# Altium PCB main.PcbDoc
Units mil, origin at the board's own origin, x right, y up, seen from the top; angles counter-clockwise.
Board outline 3937.01 x 1968.5 mil, 2 copper layers (Top Layer, Bottom Layer); 69 components, 62 nets, 286 pads, 89 vias.
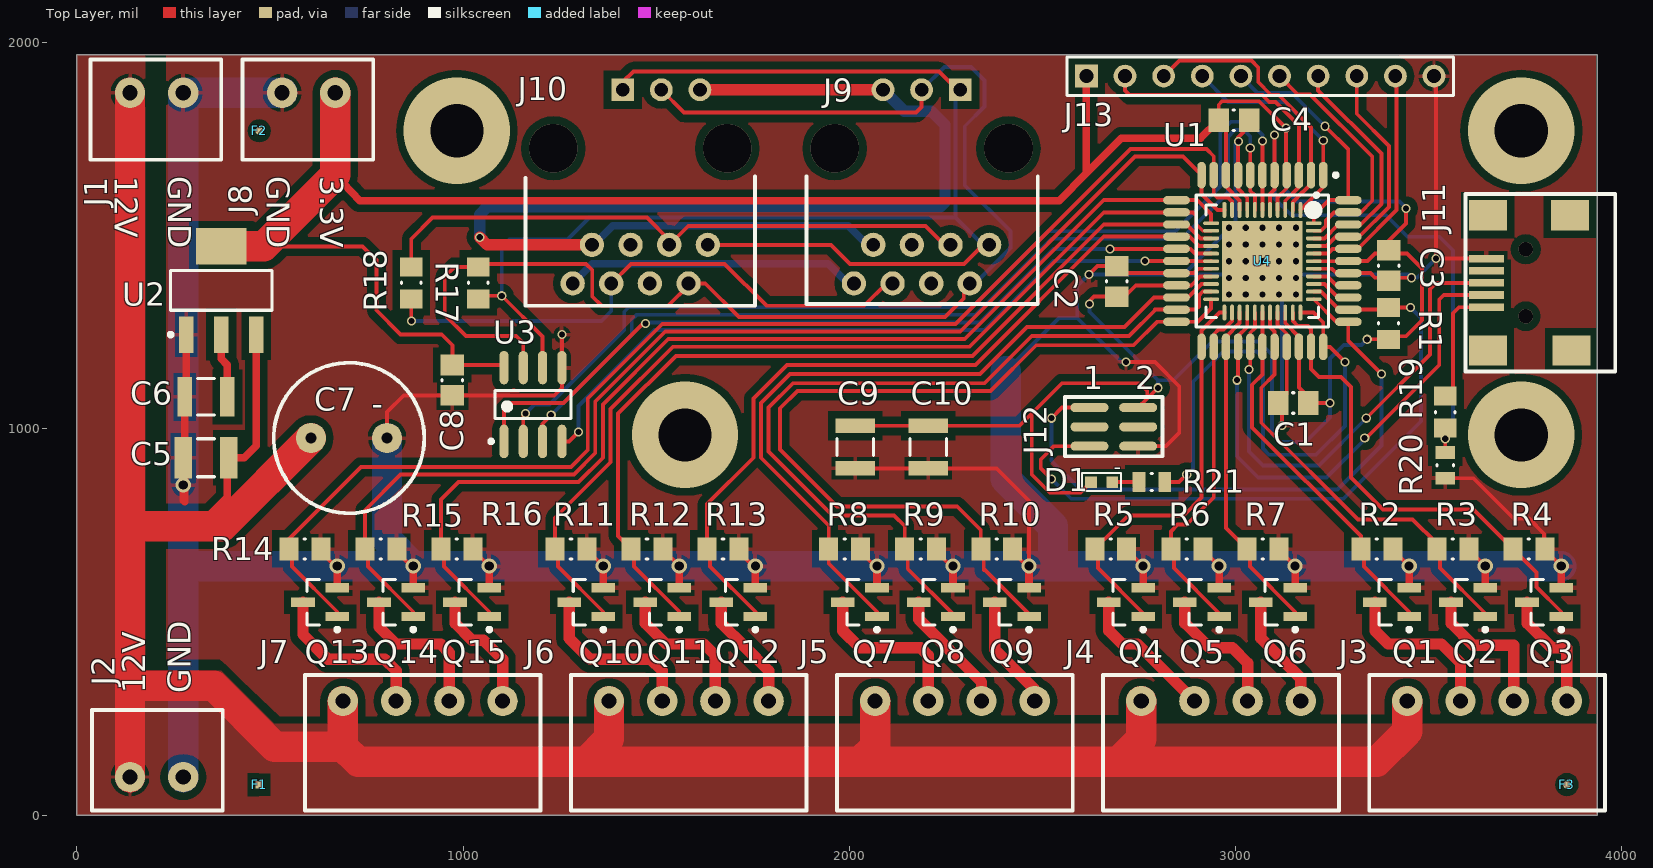
[diagram p0: Top Layer view]
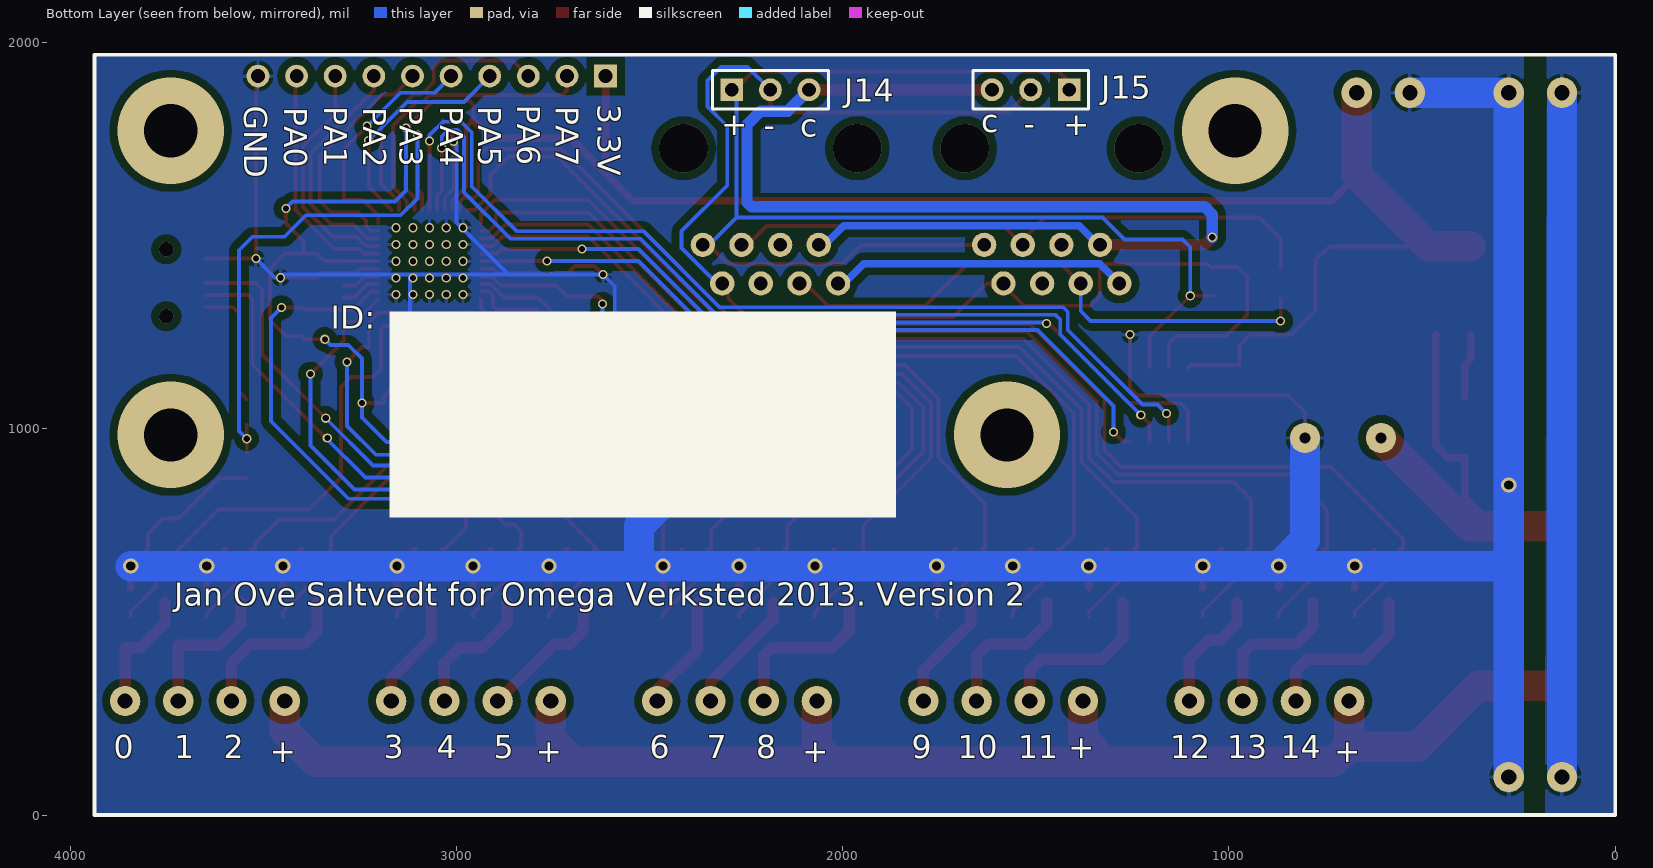
[diagram p1: Bottom Layer view, seen from below]
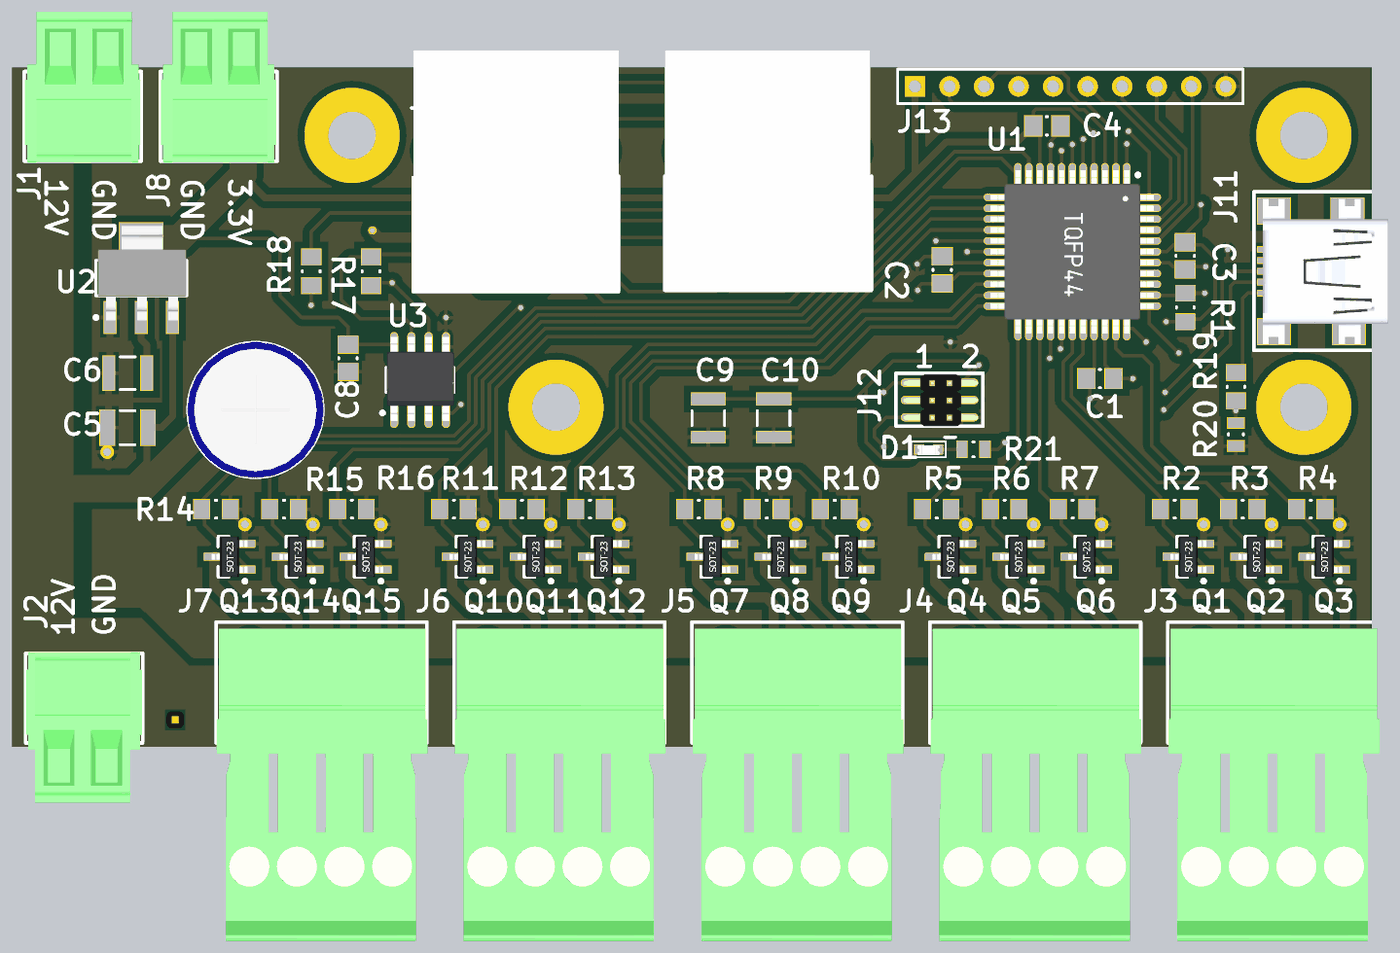
[diagram p2: 3D render of the assembled board from above, using the file's embedded part models]

## Layer stack, top to bottom
Top Layer: signal copper 1.4
Dielectric: dielectric 12.6, FR-4, Dk 4.8
Bottom Layer: signal copper 1.4

## Board outline
0,0 0,1968.5 3937.01,1968.5 3937.01,0

## Design rules (kind name [scope] priority, off if disabled: settings)
Clearance Clearance_1 [InPolygon] p1: gap=19.68
Clearance [All] p2: gap=6
ComponentClearance NO_MCU_CHECK [InComponent('U1') vs InComponent('U4')] p1: gap=-2362.2 collisioncheckmode=3 verticalgap=-2362.2 showdistances=TRUE
ComponentClearance [All] p2: gap=10 collisioncheckmode=3 verticalgap=0 showdistances=FALSE
HoleSize [All] p1: absolutevalues=TRUE maxlimit=196.85 minlimit=1.18 maxpercent=80.000 minpercent=20.000
MinimumSolderMaskSliver [All] p1: minsoldermaskwidth=3.94
PasteMaskExpansion [All] p1: expansion=-1.97
PolygonConnect [All] p1: connectstyle=Relief reliefconductorwidth=10 reliefentries=4 polygonreliefangle="90 Angle" airgapwidth=10
RoutingVias [All] p1: holewidth=15.75 width=23.62 viastyle="Through Hole" minholewidth=11.81 minwidth=19.68 maxholewidth=157.48 maxwidth=354.33
SilkToSilkClearance [All] p1: silktosilkclearance=3.94
SilkToSolderMaskClearance [IsPad] p1: minsilkscreentomaskgap=3.94 clearancetoexposedcopper=TRUE
SolderMaskExpansion [All] p1: expansion=0
Width [All] p1: maxlimit=157.48 minlimit=6 preferedwidth=10
22 further rules are at their usual default settings.

## Components (designator, comment, footprint, x,y, rotation, side; value= is the part's Value field where it differs from the comment)
C1 "CAP 3.3nF 10V 0805(2012)" CAPC0805(2012)145_M 3149.61,1066.93 r0 top
C2 "CAP 3.3nF 10V 0805(2012)" CAPC0805(2012)145_M 2692.91,1381.89 r270 top
C3 "CAP 3.3nF 10V 0805(2012)" CAPC0805(2012)145_M 3396.57,1422.82 r90 top
C4 "CAP 3.3nF 10V 0805(2012)" CAPC0805(2012)145_M 2996.06,1799.21 r180 top
C5 "CAP 1uF 16V 1210(3225)" CAPC1210(3225)155_N 334.65,925.2 r0 top
C6 "CAP 10uF 6.3V 1210(3225)" CAPC1210(3225)170_L 334.65,1082.68 r0 top
C7 "ELECTROLYTIC-CAP-220uF" ELECTROLYTIC-220UF 606.3,976.38 r0 top
C8 "CAP 3.3nF 10V 0805(2012)" CAPC0805(2012)145_M 972.44,1125.98 r90 top
C9 "CAP 10uF 6.3V 1210(3225)" CAPC1210(3225)170_L 2015.75,952.76 r90 top
C10 "CAP 10uF 6.3V 1210(3225)" CAPC1210(3225)170_L 2204.72,952.76 r90 top
D1 "LED-SMD-0603" LED-0603 2625.98,862.2 r0 top
F1 "Fiducial square" FIDU-SQUARE 460.63,66.93 r0 top
F2 "Fiducial round" FIDU-ROUND#1 472.44,1771.65 r0 top
F3 "Fiducial round" FIDU-ROUND#2 4334.63,90.55 r0 top
J1 "PLUGGABLE-TERMINAL-2" PLUG_TERMINAL_2 275.59,1870.08 r180 top
J2 "PLUGGABLE-TERMINAL-2" PLUG_TERMINAL_2 137.8,98.43 r0 top
J3 "PLUGGABLE-TERMINAL-4" PLUG_TERMINAL_4 3444.88,295.28 r0 top
J4 "PLUGGABLE-TERMINAL-4" PLUG_TERMINAL_4 2755.91,295.28 r0 top
J5 "PLUGGABLE-TERMINAL-4" PLUG_TERMINAL_4 2066.93,295.28 r0 top
J6 "PLUGGABLE-TERMINAL-4" PLUG_TERMINAL_4 1377.95,295.28 r0 top
J7 "PLUGGABLE-TERMINAL-4" PLUG_TERMINAL_4 688.98,295.28 r0 top
J8 "PLUGGABLE-TERMINAL-2" PLUG_TERMINAL_2 669.29,1870.08 r180 top
J9 "RJ-45 Connector" RJ-45 2362.2,1476.38 r180 top
J10 "RJ-45 Connector" RJ-45 1633.86,1476.38 r180 top
J11 "USB-MINI" USB-mini 3649.61,1314.96 r90 top
J12 "PDI" HEADER_SMD_3X2_50MIL 2622.05,1055.12 r270 top
J13 "Header 10" HDR1X10 2614.17,1913.39 r0 top
J14 "Header 3" HDR1X3 2287.4,1877.95 r180 bottom
J15 "Header 3" HDR1X3 1413.39,1877.95 r0 bottom
Q1 "TSM2314CX" SOT95P280X130-3N 3405.51,551.18 r180 top
Q2 "TSM2314CX" SOT95P280X130-3N 3602.36,551.18 r180 top
Q3 "TSM2314CX" SOT95P280X130-3N 3799.21,551.18 r180 top
Q4 "TSM2314CX" SOT95P280X130-3N 2716.54,551.18 r180 top
Q5 "TSM2314CX" SOT95P280X130-3N 2913.39,551.18 r180 top
Q6 "TSM2314CX" SOT95P280X130-3N 3110.24,551.18 r180 top
Q7 "TSM2314CX" SOT95P280X130-3N 2027.56,551.18 r180 top
Q8 "TSM2314CX" SOT95P280X130-3N 2224.41,551.18 r180 top
Q9 "TSM2314CX" SOT95P280X130-3N 2421.26,551.18 r180 top
Q10 "TSM2314CX" SOT95P280X130-3N 1318.9,551.18 r180 top
Q11 "TSM2314CX" SOT95P280X130-3N 1515.75,551.18 r180 top
Q12 "TSM2314CX" SOT95P280X130-3N 1712.6,551.18 r180 top
Q13 "TSM2314CX" SOT95P280X130-3N 629.92,551.18 r180 top
Q14 "TSM2314CX" SOT95P280X130-3N 826.77,551.18 r180 top
Q15 "TSM2314CX" SOT95P280X130-3N 1023.62,551.18 r180 top
R1 "10K 1% 0805(2012)" RESC0805(2012)_M 3396.57,1273.21 r270 top
R2 "10K 1% 0805(2012)" RESC0805(2012)_M 3366.14,688.98 r0 top
R3 "10K 1% 0805(2012)" RESC0805(2012)_M 3562.99,688.98 r0 top
R4 "10K 1% 0805(2012)" RESC0805(2012)_M 3759.84,688.98 r0 top
R5 "10K 1% 0805(2012)" RESC0805(2012)_M 2677.17,688.98 r0 top
R6 "10K 1% 0805(2012)" RESC0805(2012)_M 2874.02,688.98 r0 top
R7 "10K 1% 0805(2012)" RESC0805(2012)_M 3070.87,688.98 r0 top
R8 "10K 1% 0805(2012)" RESC0805(2012)_M 1988.19,688.98 r0 top
R9 "10K 1% 0805(2012)" RESC0805(2012)_M 2185.04,688.98 r0 top
R10 "10K 1% 0805(2012)" RESC0805(2012)_M 2381.89,688.98 r0 top
R11 "10K 1% 0805(2012)" RESC0805(2012)_M 1279.53,688.98 r0 top
R12 "10K 1% 0805(2012)" RESC0805(2012)_M 1476.38,688.98 r0 top
R13 "10K 1% 0805(2012)" RESC0805(2012)_M 1673.23,688.98 r0 top
R14 "10K 1% 0805(2012)" RESC0805(2012)_M 590.55,688.98 r0 top
R15 "10K 1% 0805(2012)" RESC0805(2012)_M 787.4,688.98 r0 top
R16 "10K 1% 0805(2012)" RESC0805(2012)_M 984.25,688.98 r0 top
R17 "120R 1% 0805(2012)" RESC0805(2012)_M 1039.37,1377.95 r90 top
R18 "120R 1% 0805(2012)" RESC0805(2012)_M 866.14,1377.95 r270 top
R19 "10K 1% 0805(2012)" RESC0805(2012)_M 3543.31,1043.31 r90 top
R20 "15K 1% 0805(2012)" RESC0805(2012)_L 3543.31,905.51 r90 top
R21 "200R 1% 0805(2012)" RESC0805(2012)_L 2783.46,862.2 r180 top
U1 "ATxmega64A4U-AU" 44A_N 3069.8,1434.63 r270 top
U2 "TLV1117" SOT230P700X180-4N 374.02,1358.27 r90 top
U3 "MAX3485" SOP127P600X175-8N 1181.1,1062.99 r90 top
U4 "ATxmega64A4U-MH" 44M1_N 3069.88,1434.06 r270 top

## Footprints (in the part's own frame and the unit in brackets; to place one, negate y for a bottom-side part, rotate by r counter-clockwise, add the part's x,y. Pads: shape width x height; smd on the part's side, far side on the other; paste and mask are expansions set on the pad)
44A_N [mm] "Thin QFP, 44-Leads, Body 10x10mm, Pitch 0.8mm, IPC Medium Density"
  oval 1.75x0.55 smd: 1(-5.65,4) 2(-5.65,3.2) 3(-5.65,2.4) 4(-5.65,1.6) 5(-5.65,0.8) 6(-5.65,0) 7(-5.65,-0.8) 8(-5.65,-1.6) 9(-5.65,-2.4) 10(-5.65,-3.2) 11(-5.65,-4) 23(5.65,-4) 24(5.65,-3.2) 25(5.65,-2.4) 26(5.65,-1.6) 27(5.65,-0.8) 28(5.65,0) 29(5.65,0.8) 30(5.65,1.6) 31(5.65,2.4) 32(5.65,3.2) 33(5.65,4)
  oval 0.55x1.75 smd: 12(-4,-5.65) 13(-3.2,-5.65) 14(-2.4,-5.65) 15(-1.6,-5.65) 16(-0.8,-5.65) 17(0,-5.65) 18(0.8,-5.65) 19(1.6,-5.65) 20(2.4,-5.65) 21(3.2,-5.65) 22(4,-5.65) 34(4,5.65) 35(3.2,5.65) 36(2.4,5.65) 37(1.6,5.65) 38(0.8,5.65) 39(0,5.65) 40(-0.8,5.65) 41(-1.6,5.65) 42(-2.4,5.65) 43(-3.2,5.65) 44(-4,5.65)
  silkscreen extent -5.77,-4.35 4.35,4.95, body extent -6.01,-6.01 6.01,6.01, height 1.1
44M1_N [mm] "QFN, 44-Leads, Body 7x7mm, Pitch 0.5mm, Thermal Pad 5.3x5.3mm, IPC Medium Density"
  oval 1.05x0.25 smd: 1(-3.375,2.5) 2(-3.375,2) 3(-3.375,1.5) 4(-3.375,1) 5(-3.375,0.5) 6(-3.375,0) 7(-3.375,-0.5) 8(-3.375,-1) 9(-3.375,-1.5) 10(-3.375,-2) 11(-3.375,-2.5) 23(3.375,-2.5) 24(3.375,-2) 25(3.375,-1.5) 26(3.375,-1) 27(3.375,-0.5) 28(3.375,0) 29(3.375,0.5) 30(3.375,1) 31(3.375,1.5) 32(3.375,2) 33(3.375,2.5)
  oval 0.25x1.05 smd: 12(-2.5,-3.375) 13(-2,-3.375) 14(-1.5,-3.375) 15(-1,-3.375) 16(-0.5,-3.375) 17(0,-3.375) 18(0.5,-3.375) 19(1,-3.375) 20(1.5,-3.375) 21(2,-3.375) 22(2.5,-3.375) 34(2.5,3.375) 35(2,3.375) 36(1.5,3.375) 37(1,3.375) 38(0.5,3.375) 39(0,3.375) 40(-0.5,3.375) 41(-1,3.375) 42(-1.5,3.375) 43(-2,3.375) 44(-2.5,3.375)
  rect 5.3x5.3 smd: 45(0,0)
  silkscreen extent -4.47,-3.7 3.7,3.7, body extent -3.55,-3.56 3.55,3.54, height 1
CAPC0805(2012)145_M [mm] "Chip Capacitor, Body 2.0x1.2mm, Height 1.45mm, IPC Low Density"
  rect 1.35x1.55 smd: 1(-1,0) 2(1,0)
  silkscreen extent -0.05,-0.67 0.05,0.67, body extent -1.1,-0.72 1.1,0.72, height 1.45
CAPC1210(3225)155_N [mm] "Chip Capacitor, Body 3.2x2.5mm, Height 1.55mm, IPC Medium Density"
  rect 1.15x2.7 smd: 1(-1.5,0) 2(1.5,0)
  silkscreen extent -0.55,-1.25 0.55,1.25, body extent -1.7,-1.35 1.7,1.35, height 1.55
CAPC1210(3225)170_L [mm] "Chip Capacitor, Body 3.2x2.5mm, Height 1.7mm, IPC High Density"
  rect 0.95x2.6 smd: 1(-1.4,0) 2(1.4,0)
  silkscreen extent -0.55,-1.2 0.55,1.2, body extent -1.7,-1.35 1.7,1.35, height 1.7
ELECTROLYTIC-220UF [mm] "220uF electrolytic through hole cap"
  round 2 hole 0.75: 1(0,0) 2(5,0)
  silkscreen extent -2.45,-4.95 7.45,4.95, body extent -2.53,-5.03 7.53,5.03, height 20.53
FIDU-ROUND#1 [mil] "Round fiducial"
  round 20 smd paste-20 mask+15: 1(0,0)
FIDU-ROUND#2 [mil] "Round fiducial"
  round 20 smd paste-20 mask+15: 1(-476.37,-11.81)
FIDU-SQUARE [mil] "Square fiducial"
  rect 20x20 smd paste-20 mask+15: 1(11.81,11.81)
HDR1X3 [mm] "Connector; Header; 3 Position"
  rect 1.5x1.5 hole 0.9: 1(0,0)
  round 1.5 hole 0.9: 2(2.54,0) 3(5.08,0)
  silkscreen extent -1.27,-1.27 6.35,1.27
HDR1X10 [mm] "Connector; Header; 10 Position"
  rect 1.5x1.5 hole 0.9: 1(0,0)
  round 1.5 hole 0.9: 2(2.54,0) 3(5.08,0) 4(7.62,0) 5(10.16,0) 6(12.7,0) 7(15.24,0) 8(17.78,0) 9(20.32,0) 10(22.86,0)
  silkscreen extent -1.27,-1.27 24.13,1.27
HEADER_SMD_3X2_50MIL [mm] "SMD header for pdi 50 mil pitch"
  oval 0.6x2.5 smd: 1(0,0) 2(0,3.2) 3(1.27,0) 4(1.27,3.2) 5(2.54,0) 6(2.54,3.2)
  silkscreen extent -0.7,-1.6 3.2,4.8, body extent -0.6,-1.05 3.21,4.45, height 6.4
LED-0603 [mil] "CAPACITOR 0603"
  rect 30x30 smd: 1(0,0) 2(55,0)
  silkscreen extent -23,-23 78,23, body extent -5,-17 60,12, height 27
PLUG_TERMINAL_2 [mm] "Pluggable terminal 2"
  round 2 hole 1: 1(0,0) 2(3.5,0)
  silkscreen extent -2.5,-2.2 6.1,4.4, body extent -2.45,-6.6 6.05,4.5, height 18.95
PLUG_TERMINAL_4 [mm] "Pluggable terminal 4"
  round 2 hole 1: 1(0,0) 2(3.5,0) 3(7,0) 4(10.5,0)
  silkscreen extent -2.5,-7.2 13,1.7, body extent -2.45,-21.75 13.05,1.2, height 8.1
RESC0805(2012)_L [mm] "Chip Resistor, Body 2.0x1.3mm, IPC High Density"
  rect 0.85x1.3 smd: 1(-0.85,0) 2(0.85,0)
  silkscreen extent -0.05,-0.55 0.05,0.55, body extent -1.1,-0.67 1.1,0.68, height 0.7
RESC0805(2012)_M [mm] "Chip Resistor, Body 2.0x1.3mm, IPC Low Density"
  rect 1.25x1.5 smd: 1(-1.05,0) 2(1.05,0)
  silkscreen extent -0.05,-0.65 0.05,0.65, body extent -1.1,-0.67 1.1,0.67, height 0.7
RJ-45 [mm]
  round 1.6 hole 0.9: 1(0,0) 2(1.27,2.54) 3(2.54,0) 4(3.81,2.54) 5(5.08,0) 6(6.35,2.54) 7(7.62,0) 8(8.89,2.54)
  body extent -3.1,-13.75 12,3.85, height 11.5
SOP127P600X175-8N [mm] "SOP, 8-Leads, Body 4,90x3,90mm, Pitch 1,27mm, IPC Medium Density"
  oval 2.2x0.6 smd: 1(-2.425,1.905) 2(-2.425,0.635) 3(-2.425,-0.635) 4(-2.425,-1.905) 5(2.425,-1.905) 6(2.425,-0.635) 7(2.425,0.635) 8(2.425,1.905)
  silkscreen extent -2.55,-2.5 0.93,2.88, body extent -3.01,-2.54 3.19,2.46, height 1.74
SOT95P280X130-3N [mm] "SOT23, 3-Leads, Body 2,90x2,80mm, Pitch 0,95mm, IPC Medium Density"
  rect 1.55x0.6 smd: 1(-1.125,0.95) 2(-1.125,-0.95) 3(1.125,0)
  silkscreen extent -1.25,-1.5 0.85,1.92, body extent -1.32,-1.5 1.32,1.5, height 1.08
SOT230P700X180-4N [mm] "SOT223, 4-Leads, Body 6,7x7,3mm (max), Pitch 2,30mm, IPC Medium Density"
  rect 2.4x0.95 smd: 1(-2.9,2.3) 2(-2.9,0) 3(-2.9,-2.3)
  rect 2.4x3.3 smd: 4(2.9,0)
  silkscreen extent -3.02,-3.35 1.3,3.45, body extent -3.1,-3.31 3.83,3.19, height 1.59
USB-mini [mm]
  rect 2x2.5 smd: 0(-2.85,-0.1) 0(-2.85,-5.6) 0(6.05,-5.5) 0(6.05,-0.1)
  rect 0.5x2.3 smd: 1(0,0) 2(0.8,0) 3(1.6,0) 4(2.4,0) 5(3.2,0)
  silkscreen extent -4.23,-8.47 7.45,1.38, body extent -3.78,-8.48 6.92,0.72, height 3.95

## Part data
C1 C2 C3 C4 C8: library part CMP-1036-03387-1, "CAP 3.3nF 10V ±1% 0805 (2012 Metric) Thickness 1.45mm SMD"
C5: library part CMP-1038-02008-1, "CAP 1uF 16V ±5% 1210 (3225 Metric) Thickness 1.45mm SMD"
C6 C9 C10: library part CMP-1038-02188-1, "CAP 10uF 6.3V ±10% 1210 (3225 Metric) Thickness 1.7mm SMD"
D1: library part CMP-00004-A.1, "SMD Led 0603"
F1: library part FIDUCIAL_SQUARE
F2 F3: library part FIDUCIAL_ROUND
J9 J10: library part CMP-00009-A.1, "RJ-45 Ethernet Connector"
J11: library part CMP-00000-A.2, "USB-Mini Connector"
J13: "Header, 10-Pin"
J14 J15: "Header, 3-Pin"
Q1 Q2 Q3 Q4 Q5 Q6 Q7 Q8 Q9 Q10 Q11 Q12 Q13 Q14 Q15: "MOSFET 4.9A max switching load"
R1 R2 R3 R4 R5 R6 R7 R8 R9 R10 R11 R12 R13 R14 R15 R16 R19: library part CMP-1013-00623-1, "10K 0.125W 1% 0805 (2012 Metric)  SMD"
R17 R18: library part CMP-1013-00405-1, "120R 0.125W 1% 0805 (2012 Metric)  SMD"
R20: library part CMP-1013-00641-1, "15K 0.125W 1% 0805 (2012 Metric)  SMD"
R21: library part CMP-1013-00429-1, "200R 0.125W 1% 0805 (2012 Metric)  SMD"
U1: library part CMP-0094-00068-1, "8/16-bit AVR XMEGA A4U Microcontroller, 1.6-3.6V, 32MHz, 64K + 4KB Flash, 2K EEPROM, 4K SRAM, 44-pin TQFP, Industrial Grade (-40°C to 85°C)"
U2: library part CMP-00003-A.1, "3.3V Linear Regulator"
U4: library part CMP-0094-00055-1, "8/16-bit AVR XMEGA A4U Microcontroller, 1.6-3.6V, 32MHz, 64K + 4KB Flash, 2K EEPROM, 4K SRAM, 44-pin VQFN, Industrial Grade (-40°C to 85°C)"

## Via types
v1: diameter 23.62, hole 15.75, Top Layer to Bottom Layer, tented both sides, 62 vias
v2: diameter 39.37, hole 23.62, Top Layer to Bottom Layer, 16 vias
v3: diameter 275.59, hole 137.8, Top Layer to Bottom Layer, 4 vias
v4: diameter 125.98, hole 125.98, Top Layer to Bottom Layer, 4 vias
v5: diameter 37.4, hole 37.4, Top Layer to Bottom Layer, tented both sides, 2 vias
v6: diameter 23.62, hole 15.75, Top Layer to Bottom Layer, 1 vias

## Nets (pads, with @x,y where several pads share a name; then routed paths per layer and width w, separated by ;. In a path a pad name is that pad's centre, name@x,y a point inside that pad or via, vN(x,y) a via of type N, cw(c..) or ccw(c..) an arc to the next point about the centre after c; other vN are vias at no path point)
DATA1+: J9.1 J10.1 J14.1 J15.1 R17.1 U3.6 | length 3748.8
  Top Layer w10: R17.1@1039.37,1344.49 v1(1100.39,1344.49) 1206.1,1238.78 U3.6 ; J15.1 1413.39,1897.64 1440.95,1925.2 2232.28,1925.2 2287.4,1870.08 J14.1 ; J10.1 1952.76,1476.38 2001.97,1427.17 2297.24,1427.17 J9.1@2346.46,1476.38
  Bottom Layer w10: v1(1100.39,1344.49) 1100.39,1470.47 1119.91,1489.98 1270.51,1489.98 1327.77,1547.24 2275.59,1547.24 ; J14.1 2275.59,1866.14 2275.59,1547.24 ; J9.1@2346.46,1476.38 2275.59,1547.24
DATA1-: J9.2 J10.2 J14.2 J15.2 R17.2 U3.7 | length 3571.1
  Top Layer w10: R17.2 978.35,1419.29 952.76,1393.7 952.76,1295.28 1007.87,1240.16 1137.8,1240.16 1156.1,1221.85 U3.7 ; R17.2@1043.31,1415.35 1055.12,1427.17 1318.9,1427.17 1334.65,1411.42 1334.65,1342.52 1358.27,1318.9 1531.5,1318.9 1583.86,1371.26 J10.2 1627.17,1376.38 1714.17,1289.37 2248.03,1289.37 2296.46,1337.8 J9.2@2296.46,1376.38 ; J15.2 1572.44,1818.9 2173.23,1818.9 2187.4,1833.07 J14.2
  Bottom Layer w10: J14.2 2246.46,1937.01 2314.96,1937.01 2350.39,1901.57 2350.39,1834.65 2299.21,1783.46 2299.21,1629.92 2417.32,1511.81 2417.32,1468.5 2325.2,1376.38 J9.2@2296.46,1376.38
DATA2+: J9.3 J10.3 R18.1 | length 1553.4
  Top Layer w10: R18.1 866.14,1492.13 920.87,1546.85 1476.38,1546.85 1533.86,1489.37 J10.3 1583.07,1525.59 2197.24,1525.59 J9.3@2246.46,1476.38
DATA2-: J9.6 J10.6 R18.2 | length 1459
  Top Layer w10: v1(866.14,1279.53) R18.2 ; J10.6 1434.65,1427.17 1677.17,1427.17 1785.43,1318.9 2038.98,1318.9 J9.6@2096.46,1376.38
  Bottom Layer w10: v1(866.14,1279.53) 1358.27,1279.53 1383.86,1305.12 J10.6
GND: C1.1 C2.1 C3.1 C4.1 C5.1 C6.1 C7.2 C8.1 C9.1 C10.1 J1.1 J2.2 J8.2 J11.5 J12.6 J13.10 Q1.2 Q2.2 Q3.2 Q4.2 Q5.2 Q6.2 Q7.2 Q8.2 Q9.2 Q10.2 Q11.2 Q12.2 Q13.2 Q14.2 Q15.2 R2.2 R3.2 R4.2 R5.2 R6.2 R7.2 R8.2 R9.2 R10.2 R11.2 R12.2 R13.2 R14.2 R15.2 R16.2 R20.1 U1.8 U1.18 U1.30 U1.38 U2.1 U3.5 U4.8 U4.18 U4.30 U4.38 U4.45 | length 14981.8
  Top Layer w10: R14.2@624.02,688.98 668.31,644.69 v2(674.21,644.69) ; C7.2 803.15,1043.31 846.46,1086.61 1236.22,1086.61 1256.1,1106.5 U3.5 v1(1256.1,1243.9) ; R15.2@820.87,688.98 865.16,644.69 v2(871.06,644.69) ; R16.2@1017.72,688.98 1023.62,688.98 v2(1067.91,644.69) ; R11.2@1312.99,688.98 1318.9,688.98 v2(1363.19,644.69) ; R12.2@1509.84,688.98 1515.75,688.98 v2(1560.04,644.69) ; R13.2@1706.69,688.98 1750.98,644.69 v2(1756.89,644.69) ; C9.1 C10.1 2381.89,897.64 2465.55,813.98 v2(2465.55,644.69) 2459.65,644.69 R10.2@2415.35,688.98 ; R8.2@2021.65,688.98 2065.94,644.69 v2(2071.85,644.69) ; R9.2@2218.5,688.98 2262.8,644.69 v2(2268.7,644.69) ; v1(2620.49,1399.2) 2642.55,1421.26 C2.1 2711.04,1403.13 U1.18 2892.31,1403.13 2903.54,1414.37 U4.18 ; R5.2@2710.63,688.98 2716.54,688.98 v2(2760.83,644.69) ; v1(2716.54,1173.23) 2791.34,1173.23 2854.33,1110.24 2854.33,988.98 2820.47,955.12 J12.6 ; R6.2@2907.48,688.98 2913.39,688.98 v2(2957.68,644.69) ; v1@3006.81,1744.09 U1.8 3006.81,1622.13 3030.51,1598.43 U4.8 ; v1@3006.81,1754.84 3035.43,1783.46 C4.1 ; R7.2@3104.33,688.98 3110.24,688.98 v2(3154.53,644.69) ; U4.30 3109.25,1269.68 3132.8,1246.14 U1.30 3132.8,1089.49 C1.1 3120.98,1056.18 v1(3120.98,1008.94) ; U4.38 3250,1414.37 3261.24,1403.13 U1.38 3349.33,1403.13 3361.14,1391.32 v1(3455.63,1391.32) ; R2.2@3399.61,688.98 3405.51,688.98 v2(3449.8,644.68) ; J13.10 3519.69,1907.87 v1(3519.69,1440.94) J11.5 ; R20.1 3616.14,872.05 3720.47,767.72 3759.84,767.72 3799.21,728.35 3799.21,688.98 v2(3843.5,644.68) ; R3.2@3596.46,688.98 3602.36,688.98 v2(3646.65,644.68)
  Top Layer w19.68: v2(275.59,854.33) 275.59,814.96 279.53,811.02 C6.1 283.46,1086.61 U2.1 ; Q13.2 v2(674.21,644.69) ; Q14.2 v2(871.06,644.69) ; Q15.2 v2(1067.91,644.69) ; Q10.2 v2(1363.19,644.69) ; Q11.2 v2(1560.04,644.69) ; Q12.2 v2(1756.89,644.69) ; Q7.2 v2(2071.85,644.69) ; Q8.2 v2(2268.7,644.69) ; Q9.2 v2(2465.55,644.69) ; Q4.2 v2(2760.83,644.69) ; Q5.2 v2(2957.68,644.69) ; Q6.2 v2(3154.53,644.69) ; Q1.2 v2(3449.8,644.68) ; Q2.2 v2(3646.65,644.68) ; Q3.2 v2(3843.5,644.68)
  Bottom Layer w10: 2405.51,1149.61 2543.31,1287.4 2590.55,1287.4 ; v1(2716.54,1173.23) 2704.72,1173.23 2590.55,1287.4 ; v1(3007.87,1744.09) 3000,1736.22 3000,1534.12 2865.08,1399.2 ; v1(3120.98,1008.94) 3120.98,1391.32 v1@3113.11,1399.2 ; v1(3519.69,1440.94) 3470.06,1391.32 v1(3455.63,1391.32) 3447.76,1399.2 v1@3113.11,1399.2 ; 2590.55,1287.4 2590.55,1369.26 v1(2620.49,1399.2) 2865.08,1399.2 ; 2865.08,1399.2 v1@3113.11,1399.2
  Bottom Layer w78.74: J2.2 275.59,629.92 ; J8.2 J1.1 275.59,629.92 ; C7.2 803.15,712.6 v2(871.06,644.69) ; 2405.51,1149.61 2405.51,870.08 2527.56,748.03 2527.56,644.68 ; v2(3843.5,644.68) v2(3646.65,644.68) v2(3449.8,644.68) 2527.56,644.68 ; 275.59,629.92 290.35,644.69 v2(674.21,644.69) v2(2268.7,644.69) 2527.56,644.68
  other v1: 2983.27,1347.44 3026.57,1347.44 3069.88,1347.44 3113.19,1347.44 3156.5,1347.44 2983.27,1390.75 3026.57,1390.75 3069.88,1390.75 3113.19,1390.75 3156.5,1390.75 2983.27,1434.06 3026.57,1434.06 3069.88,1434.06 3113.19,1434.06 3156.5,1434.06 2983.27,1477.36 3026.57,1477.36 3069.88,1477.36 3113.19,1477.36 3156.5,1477.36 2983.27,1520.67 3026.57,1520.67 3069.88,1520.67 3113.19,1520.67 3156.5,1520.67
NetC6_2: C6.2 U2.2 | length 167.9
  Top Layer w19.68: U2.2 374.02,1181.1 389.76,1165.35 C6.2
NetD1_2: D1.2 R21.2 | length 69
  Top Layer w10: D1.2 R21.2
NetR19_1: R19.1 R20.2 U1.5 U4.5 | length 1447.4
  Top Layer w10: U4.5 3089.57,1608.27 3101.3,1620 U1.5 v1(3101.3,1760.91) ; R20.2 v1(3543.31,974.41) R19.1@3543.31,1009.84
  Bottom Layer w10: v1(3101.3,1760.91) 3101.3,1596.54 3144.69,1553.15 3389.76,1553.15 3445.49,1497.42 3527.93,1497.42 3562.99,1462.36 3562.99,994.09 v1(3543.31,974.41)
NetU1_36: U1.36 U4.36 | length 103.9
  Top Layer w10: U4.36 3230.31,1375 3265.17,1340.14 U1.36
NetU1_37: U1.37 U4.37 | length 99
  Top Layer w10: U4.37 3238.19,1394.68 3261.24,1371.64 U1.37
PA0: J13.9 U1.40 U4.40 | length 609.2
  Top Layer w10: U4.40 3239.16,1453.74 3251.55,1466.13 U1.40 3316.52,1466.13 3417.32,1566.93 3417.32,1910.24 J13.9
PA1: J13.8 U1.41 U4.41 | length 610
  Top Layer w10: U4.41 3236.22,1473.43 3260.42,1497.62 U1.41 3320.46,1497.62 3397.64,1574.8 3397.64,1732.28 3314.17,1815.75 J13.8
PA2: J13.7 U1.42 U4.42 | length 610.8
  Top Layer w10: U4.42 3230.31,1493.11 3266.32,1529.12 U1.42 3324.39,1529.12 3377.95,1582.68 3377.95,1712.6 3214.17,1876.38 J13.7
PA3: J13.6 U1.43 U4.43 | length 632.8
  Top Layer w10: J13.6 3161.42,1866.14 3192.91,1866.14 3354.33,1704.72 3354.33,1590.55 3324.39,1560.61 U1.43 3255.44,1560.61 3234.25,1539.42 3234.43,1539.25 3234.43,1525.76 3221.46,1512.8 U4.43
PA4: J13.5 U1.44 U4.44 | length 613.8
  Top Layer w10: U4.44 3202.76,1552.17 3242.7,1592.11 U1.44 3292.24,1723.5 v1(3232.28,1783.46)
  Bottom Layer w10: J13.5 3057.48,1870.08 3145.67,1870.08 v1(3232.28,1783.46)
PA5: J13.4 U1.1 U4.1 | length 586.5
  Top Layer w10: U4.1 3227.28,1625.91 U1.1 v1(3227.28,1746.97)
  Bottom Layer w10: J13.4 2981.1,1846.46 3127.8,1846.46 v1(3227.28,1746.97)
PA6: J13.3 U1.2 U4.2 | length 726.3
  Top Layer w10: J13.3 2854.7,1953.91 3041.17,1953.91 3059.06,1936.02 3059.06,1897.64 3091.54,1865.16 3111.22,1865.16 3195.79,1780.59 U1.2 3195.79,1634.08 3173.33,1611.62 3172.64,1611.62 3148.62,1587.61 U4.2
PA7: J13.2 U1.3 U4.3 | length 758
  Top Layer w10: J13.2 2714.17,1876.38 2726.38,1864.17 3069.88,1864.17 3087.6,1846.46 3103.35,1846.46 3164.29,1785.51 U1.3 3164.29,1625.91 3128.94,1590.55 U4.3
PDI_CLK: J12.5 R1.1 U1.35 U4.35 | length 1837.6
  Top Layer w10: v1(2523.62,870.08) 2496.06,897.64 2496.06,921.26 2529.92,955.12 J12.5 ; U4.35 3221.46,1355.31 3268.13,1308.65 U1.35 R1.1@3394.61,1308.65 ; R1.1 v1(3453.17,1314.55)
  Bottom Layer w10: v1(2523.62,870.08) 2574.8,818.9 3279.53,818.9 3480.31,1019.69 3480.31,1287.4 v1(3453.17,1314.55)
PDI_DATA: J12.1 U1.34 U4.34 | length 1622.4
  Top Layer w10: v1(2523.62,1027.56) 2551.18,1055.12 J12.1 ; U4.34 3261.24,1277.15 U1.34 3292.24,1227.44 v1(3377.95,1141.73)
  Bottom Layer w10: v1(2523.62,1027.56) 2523.62,917.32 2598.43,842.52 3263.78,842.52 3377.95,956.69 v1(3377.95,1141.73)
PWM1: Q1.1 R2.1 U1.28 U4.28 | length 966.8
  Top Layer w10: U4.28 3069.88,1212.27 U1.28 3069.8,1140.67 3043.31,1114.17 3043.31,1003.94 3324.8,722.44 R2.1 3332.68,681.1 3332.68,643.7 3449.8,526.57 Q1.1
PWM2: Q2.1 R3.1 U1.29 U4.29 | length 1126.4
  Top Layer w10: U4.29 3089.57,1263.78 3101.3,1252.05 U1.29 3101.3,1140.67 3066.93,1106.3 3066.93,1015.75 3316.93,765.75 3458.66,765.75 3521.65,702.76 R3.1 ; R3.1@3529.53,688.98 3529.53,639.76 3646.65,522.64 Q2.1
PWM3: Q3.1 R4.1 U1.32 U4.32 | length 1261.5
  Top Layer w10: U4.32 3148.62,1279.53 3161.42,1266.73 3187.99,1266.73 3195.79,1258.94 U1.32 3195.79,1154.61 3216.54,1133.86 3273.62,1133.86 3299.21,1108.27 3299.21,874.02 3381.89,791.34 3616.14,791.34 R4.1 3779.53,627.95 3779.53,590.55 3843.5,526.57 Q3.1
PWM4: Q4.1 R5.1 U1.23 U4.23 | length 1066.6
  Top Layer w10: R5.1 2722.44,775.59 2866.14,775.59 2912.32,821.77 U1.23 2912.32,1254.84 2958.66,1301.18 U4.23 ; R5.1@2643.7,688.98 2643.7,639.76 2760.83,522.64 Q4.1
PWM5: Q5.1 R6.1 U1.24 U4.24 | length 922.9
  Top Layer w10: R6.1 2832.68,734.25 2850.39,751.97 2874.02,751.97 2943.82,821.77 U1.24 ; R6.1@2840.55,688.98 2840.55,639.76 2957.68,522.64 Q5.1
  Top Layer w10.08: U1.24 2943.82,1245 2956.5,1257.68 2969.29,1257.68 2991.14,1279.53 U4.24
PWM6: Q6.1 R7.1 U1.25 U4.25 | length 873.1
  Top Layer w10: U1.25 2975.31,743.19 R7.1 ; R7.1@3037.4,688.98 3037.4,643.7 3154.53,526.57 Q6.1
  Top Layer w10.08: U1.25 2975.31,1238.11 3010.83,1273.62 U4.25
PWM7: Q7.1 R8.1 U1.20 U4.20 | length 1970.5
  Top Layer w10: Q7.1 2071.85,526.57 1946.85,651.57 R8.1 1946.85,750 1771.65,925.2 1771.65,1066.93 1846.46,1141.73 2338.58,1141.73 2460.63,1263.78 2712.6,1263.78 2788.96,1340.14 U1.20 2877.55,1340.14 2912.41,1375 U4.20
PWM8: Q8.1 R9.1 U1.21 U4.21 | length 2116.9
  Top Layer w10: R9.1 2143.7,748.03 2116.14,775.59 1956.69,775.59 1791.34,940.94 1791.34,1055.12 1854.33,1118.11 2350.39,1118.11 2472.44,1240.16 2724.41,1240.16 2791.34,1307.09 2791.34,1308.65 U1.21 2897.23,1308.65 2905.34,1316.76 2905.34,1345.3 2915.35,1355.31 U4.21 ; R9.1@2151.57,688.98 2151.57,637.6 2268.7,520.48 Q8.1
PWM9: Q9.1 R10.1 U1.22 U4.22 | length 2234
  Top Layer w10: R10.1 2340.55,738.19 2279.53,799.21 1968.5,799.21 1821.12,946.6 1821.12,1053.4 1866.14,1098.43 2366.14,1098.43 2484.25,1216.54 2736.22,1216.54 2796.83,1277.15 U1.22 2902.15,1277.15 2937.01,1312.01 U4.22 ; R10.1@2348.43,688.98 2348.43,634.35 2351.68,634.35 2465.55,520.48 Q9.1
PWM10: Q10.1 R11.1 U1.13 U4.13 | length 2444.6
  Top Layer w10: R11.1 1238.19,769.69 1381.89,913.39 1381.89,1051.18 1543.31,1212.6 2311.02,1212.6 2659.04,1560.61 U1.13 2890.17,1560.61 2898.62,1552.17 2898.62,1529.53 2915.35,1512.8 U4.13 ; R11.1@1246.06,688.98 1246.06,643.7 1363.19,526.57 Q10.1
PWM11: Q11.1 R12.1 U1.14 U4.14 | length 2341.2
  Top Layer w10: R12.1 1401.57,722.44 1401.57,1039.37 1551.18,1188.98 2318.9,1188.98 2659.04,1529.12 U1.14 2873.44,1529.12 2909.45,1493.11 U4.14 ; R12.1@1442.91,688.98 1442.91,643.7 1560.04,526.57 Q11.1
PWM12: Q12.1 R13.1 U1.15 U4.15 | length 2031.8
  Top Layer w10: R13.1 1631.89,805.12 1751.97,925.2 1751.97,1078.74 1838.58,1165.35 2326.77,1165.35 2659.04,1497.62 U1.15 2881.32,1497.62 2905.51,1473.43 U4.15 ; R13.1@1639.76,688.98 1639.76,643.7 1756.89,526.57 Q12.1
PWM13: Q13.1 R14.1 U1.10 U4.10 | length 3322.9
  Top Layer w10: R14.1 549.21,714.57 736.22,901.57 1279.53,901.57 1322.83,944.88 1322.83,1078.74 1515.75,1271.65 2275.59,1271.65 2728.35,1724.41 2925.2,1724.41 2943.82,1705.79 U1.10 2943.82,1608.35 2952.76,1599.41 2980.33,1599.41 2991.14,1588.59 U4.10 ; R14.1@557.09,688.98 557.09,643.7 674.21,526.57 Q13.1
PWM14: Q14.1 R15.1 U1.11 U4.11 | length 3092.7
  Top Layer w10: R15.1 746.06,789.37 838.58,881.89 1287.4,881.89 1342.52,937.01 1342.52,1070.87 1523.62,1251.97 2287.4,1251.97 2740.16,1704.72 2864.67,1704.72 U1.11 2912.32,1608.35 2953.74,1566.93 U4.11 ; R15.1@753.94,688.98 753.94,643.7 871.06,526.57 Q14.1
PWM15: Q15.1 R16.1 U1.12 U4.12 | length 2786.1
  Top Layer w10: R16.1 942.91,816.93 988.19,862.2 1299.21,862.2 1362.2,925.2 1362.2,1062.99 1531.5,1232.28 2299.21,1232.28 2659.04,1592.11 U1.12 2901,1592.11 2937.01,1556.1 U4.12 ; R16.1@950.79,688.98 950.79,643.7 1067.91,526.57 Q15.1
RS485_DE: U1.7 U3.3 U4.7 | length 2502
  Top Layer w10: U3.3 1206.1,1013.19 v1(1228.35,1035.43) ; v1(3038.31,1727.28) U1.7 3038.31,1616.22 3050.2,1604.33 U4.7
  Bottom Layer w10: v1(1228.35,1035.43) 1437.01,1244.09 1437.01,1283.46 1448.82,1295.28 2326.77,1295.28 2523.62,1492.13 2860.24,1492.13 2980.31,1612.2 2980.31,1755.91 2998.03,1773.62 3021.65,1773.62 3038.31,1756.97 v1(3038.31,1727.28)
RS485_RE!: U1.6 U3.2 U4.6 | length 2613.3
  Top Layer w10: U3.2 1156.1,1034.06 v1(1161.42,1039.37) ; v1(3069.8,1745.16) U1.6 3069.88,1656.99 U4.6
  Bottom Layer w10: v1(1161.42,1039.37) 1185.04,1062.99 1224.41,1062.99 1417.32,1255.91 1417.32,1303.15 1429.13,1314.96 2318.9,1314.96 2515.75,1511.81 2844.49,1511.81 2960.63,1627.95 2960.63,1767.72 2988.19,1795.28 3035.43,1795.28 3069.8,1760.91 v1(3069.8,1745.16)
RS485_RX: U1.16 U3.1 U4.16 | length 2090.4
  Top Layer w10: U3.1 1106.1,1047.05 1125.98,1066.93 1259.84,1066.93 1468.5,1275.59 1469.36,1275.59 v1(1472.49,1272.46) ; v1(2674.79,1466.13) U1.16 2883.28,1466.13 2895.67,1453.74 U4.16
  Bottom Layer w10: v1@1472.49,1275.59 2338.58,1275.59 2529.12,1466.13 v1(2674.79,1466.13)
RS485_TX: U1.17 U3.4 U4.17 | length 1914.6
  Top Layer w10: U3.4 1274.61,967.52 v1(1299.21,992.13) ; v1(2765.34,1434.63) U1.17 2900.02,1434.63 2900.59,1434.06 U4.17 U4.17@2936.43,1434.63
  Bottom Layer w10: v1(1299.21,992.13) 1299.21,1059.06 1496.06,1255.91 2350.39,1255.91 2529.12,1434.63 v1(2765.34,1434.63)
S1: J3.2 Q1.3 | length 428.4
  Top Layer w29.53: Q1.3 3361.22,477.36 3395.67,442.91 3533.46,442.91 3582.68,393.7 J3.2
S2: J3.3 Q2.3 | length 384.9
  Top Layer w29.53: Q2.3 3558.07,497.05 3615.16,439.96 3720.47,439.96 J3.3
S3: J3.4 Q3.3 | length 321.8
  Top Layer w29.53: Q3.3 3754.92,497.05 3818.9,433.07 3858.27,433.07 J3.4
S4: J4.2 Q4.3 | length 370.7
  Top Layer w29.53: Q4.3 2672.24,477.36 2706.69,442.91 2746.06,442.91 J4.2
S5: J4.3 Q5.3 | length 357.8
  Top Layer w29.53: Q5.3 2869.09,497.05 2933.07,433.07 2992.13,433.07 3031.5,393.7 J4.3
S6: J4.4 Q6.3 | length 319.6
  Top Layer w29.53: Q6.3 3065.94,457.68 3169.29,354.33 J4.4 J4.4@3154.53,310.04
S7: J5.2 Q7.3 | length 439.9
  Top Layer w29.53: Q7.3 1983.27,477.36 2027.56,433.07 2185.04,433.07 2204.72,413.39 J5.2
S8: J5.3 Q8.3 | length 283.8
  Top Layer w29.53: Q8.3 2180.12,506.89 2342.52,344.49 J5.3@2342.52,334.65
S9: J5.4 Q9.3 | length 298.7
  Top Layer w29.53: Q9.3 2376.97,428.15 2480.31,324.8 J5.4
S10: J6.2 Q10.3 | length 448
  Top Layer w29.53: Q10.3 1274.61,457.68 1328.74,403.54 1486.22,403.54 1515.75,374.02 J6.2
S11: J6.3 Q11.3 | length 389
  Top Layer w29.53: Q11.3 1471.46,497.05 1525.59,442.91 1624.02,442.91 1653.54,413.39 J6.3
S12: J6.4 Q12.3 | length 306.9
  Top Layer w29.53: Q12.3 1668.31,497.05 1732.28,433.07 1791.34,374.02 J6.4
S13: J7.2 Q13.3 | length 442.3
  Top Layer w29.53: Q13.3 585.63,467.52 649.61,403.54 797.24,403.54 826.77,374.02 J7.2
S14: J7.3 Q14.3 | length 398.8
  Top Layer w29.53: Q14.3 782.48,487.2 826.77,442.91 941.93,442.91 964.57,420.28 J7.3
S15: J7.4 Q15.3 | length 324.2
  Top Layer w29.53: Q15.3 979.33,497.05 1023.62,452.76 1053.15,452.76 1102.36,403.54 J7.4
SIGNAL_COMMON_DATA1: J9.7 J10.7 J14.3 J15.3 | length 3154.9
  Top Layer w29.53: v6(1043.31,1496.06) 1062.99,1476.38 J10.7@1318.9,1476.38 ; J15.3 J14.3
  Bottom Layer w19.68: J10.7@1357.87,1495.67 1387.8,1525.59 1997.24,1525.59 J9.7@2046.46,1476.38
  Bottom Layer w29.53: v6(1043.31,1496.06) 1043.31,1555.12 1062.99,1574.8 2236.22,1574.8 2248.03,1586.61 2248.03,1787.4 2212.6,1822.83 2142.52,1822.83 J14.3
SIGNAL_COMMON_DATA2: J9.8 J10.8 | length 754.7
  Bottom Layer w19.68: J10.8 1334.65,1427.17 1945.67,1427.17 J9.8@1996.46,1376.38
STATUS_LED: R21.1 U1.33 U4.33 | length 1389.2
  Top Layer w10.08: R21.1 2854.33,862.2 v1(2874.02,881.89) ; U4.33 3201.77,1301.18 3227.28,1275.67 U1.33 3244.5,1212.19 v1(3283.46,1173.23)
  Bottom Layer w10.08: v1(2874.02,881.89) 2889.76,897.64 2889.76,1122.05 2968.5,1200.79 3055.12,1200.79 3070.87,1185.04 3070.87,948.82 3086.61,933.07 3208.66,933.07 3283.46,1007.87 v1(3283.46,1173.23)
USB_D+: J11.3 U1.27 U4.27 | length 1290.1
  Top Layer w10: v1(3035.43,1153.54) 3038.31,1156.42 U1.27 3038.31,1248.94 3050.2,1260.83 U4.27 ; v1(3338.58,1027.56) 3503.94,1192.91 3503.94,1362.2 3519.69,1377.95 J11.3
  Bottom Layer w10: v1(3035.43,1153.54) 3035.43,940.94 3070.87,905.51 3216.54,905.51 v1(3338.58,1027.56)
USB_D-: J11.2 U1.26 U4.26 | length 1354.3
  Top Layer w10: v1(3003.94,1125.98) 3006.81,1128.86 U1.26 3006.81,1240.08 3030.51,1263.78 U4.26 ; v1(3334.65,976.38) 3338.58,976.38 3527.56,1165.35 3527.56,1334.65 3539.37,1346.46 J11.2
  Bottom Layer w10: v1(3003.94,1125.98) 3003.94,929.13 3059.06,874.02 3236.22,874.02 3338.58,976.38 v1(3334.65,976.38)
VCC: C1.2 C2.2 C3.2 C4.2 C8.2 C9.2 C10.2 D1.1 J8.1 J12.2 J13.1 R1.2 U1.4 U1.9 U1.19 U1.31 U1.39 U2.4 U3.8 U4.4 U4.9 U4.19 U4.31 U4.39 | length 9358.4
  Top Layer w10: U2.4 740.16,1472.44 775.59,1437.01 775.59,1307.09 838.58,1244.09 944.88,1244.09 972.44,1216.54 C8.2 1099.21,1165.35 U3.8 ; C9.2 C10.2 2440.94,1007.87 2472.44,1039.37 ; v1(2622.05,1322.83) 2622.05,1330.71 2633.86,1342.52 C2.2 2712.6,1342.52 2741.72,1371.64 U1.19 2885.42,1371.64 2908.46,1394.68 U4.19 ; D1.1 2598.43,834.65 2519.68,834.65 2472.44,881.89 2472.44,1039.37 ; J12.2 2771.65,1078.74 ; v1(2799.21,1106.3) 2771.65,1078.74 ; U4.9 3010.83,1591.54 2975.31,1627.05 U1.9 2975.31,1780.59 C4.2 2956.69,1839.31 2965.55,1848.17 3061.28,1848.17 v1(3130.91,1778.54) 3130.91,1658.96 U1.4 3132.8,1622.95 3109.25,1599.41 U4.4 ; U4.31 3128.94,1273.62 3164.29,1238.27 U1.31 3164.29,1107.36 3188.98,1082.68 C1.2 v1(3245.08,1066.93) ; U4.39 3291.67,1434.06 U1.39 3341.46,1434.63 3361.14,1454.31 3443.82,1454.31 3483.19,1414.94 3483.19,1281.09 3441.85,1239.75 R1.2@3396.57,1239.75 ; v1(3341.13,1231.87) R1.2 ; C3.2 3396.57,1486.81 3441.93,1532.16 v1(3441.93,1570.87) ; 2472.44,1039.37 2551.18,1118.11 2751.97,1118.11 2771.65,1098.43 2771.65,1078.74
  Top Layer w19.68: 669.29,1657.48 732.28,1590.55 2543.31,1590.55 2614.17,1661.42 ; J13.1 2614.17,1661.42 ; C4.2 2909.45,1751.97 2704.72,1751.97 2614.17,1661.42
  Top Layer w78.74: U2.4 484.25,1472.44 669.29,1657.48 J8.1
  Bottom Layer w10: v1(2622.05,1322.83) 2622.05,1303.15 2799.21,1125.98 ; v1(2799.21,1106.3) 2799.21,1125.98 ; v1(3130.91,1778.54) 3130.91,1617.13 3159.45,1588.58 3425.2,1588.58 3441.93,1571.85 v1(3441.93,1570.87) ; v1(3341.13,1231.87) 3326.77,1217.52 3280.51,1217.52 3245.08,1182.09 v1(3245.08,1066.93) 3245.08,1029.53 3181.1,965.55 3116.14,965.55 3094.49,987.2 3094.49,1191.93 3060.04,1226.38 2939.96,1226.38 2839.57,1125.98 2799.21,1125.98
VIN: C5.2 C7.1 J1.2 J2.1 J3.1 J4.1 J5.1 J6.1 J7.1 U2.3 | length 9081.8
  Top Layer w19.68: 314.96,748.03 389.76,822.83 389.76,925.2 433.07,925.2 464.57,956.69 U2.3
  Top Layer w78.74: 137.8,748.03 314.96,748.03 377.95,748.03 C7.1 ; J1.2 137.8,98.43 137.8,334.65 354.33,334.65 511.81,177.16 688.98,177.16 ; J7.1 688.98,177.16 ; J6.1 1377.96,196.85 1318.9,137.8 ; J5.1 2066.93,177.17 2027.56,137.8 ; J4.1 2755.91,196.85 2696.85,137.8 ; J3.1 3444.89,216.54 3366.14,137.8 2696.85,137.8 ; 688.98,177.16 728.35,137.8 1318.9,137.8 ; 1318.9,137.8 2027.56,137.8 ; 2027.56,137.8 2696.85,137.8
  Bottom Layer w78.74: J2.1@137.8,98.43 J1.2
VUSB: J11.1 R19.2 | length 323.7
  Top Layer w10: R19.2@3543.31,1076.77 3562.99,1096.46 3562.99,1299.21 3578.74,1314.96 J11.1
pads on no net: F1.1 F2.1 F3.1 J9.4 J9.5 J10.4 J10.5 J11.0 J11.4 J12.3 J12.4
copper on no net:
  other v3: 1574.8,984.25 3740.16,984.25 984.25,1771.65 3740.16,1771.65
  other v4: 1233.86,1726.38 1683.86,1726.38 1962.2,1726.38 2412.2,1726.38
  other v5: 3751.97,1291.34 3751.97,1464.57

## Polygon pours and split planes (outlines as drawn)
VIN on Bottom Layer "Top Layer-No Net" (solid, pour order 11): 177.17,1968.5 181.1,0 0,0 0,1968.5
GND on Bottom Layer "Top Layer-No Net" (solid, pour order 13): 236.22,1968.5 236.22,1787.4 236.22,0 3937.01,0 3937.01,1968.5
no net on Bottom Overlay "Top Layer-No Net" (solid): 3173.23,1303.15 3173.23,771.65 2157.48,771.65 1862.2,771.65 1862.2,1303.15
no net on Bottom Solder "Top Layer-No Net" (solid): 98.43,98.43 98.43,1870.08 137.8,1909.45 177.17,1870.08 177.17,98.43 137.8,59.06 98.43,98.43
VIN on Top Layer "Top Layer-No Net" (solid, pour order 6): 3937.01,0 3937.01,236.22 3720.47,236.22 472.44,236.22 472.44,0
VIN on Top Layer "Top Layer-No Net" (solid, pour order 8): 472.44,0 0,0 0,1968.5 177.17,1968.5 177.17,374.02 374.02,374.02 511.81,236.22 511.81,0
GND on Top Layer "Top Layer-No Net" (solid, pour order 9): 231.7,1966.96 231.7,403.97 369.5,403.97 526.98,254.36 3932.49,262.23 3932.49,1966.96

## Silkscreen, mask and mechanical layers (free items; w line width, h text height)
Top Overlay:
  lines w10: 1161.42,1649.61 1161.42,1318.9 1755.91,1318.9 1755.91,1653.54 ; 1889.76,1653.54 1889.76,1322.83 2488.19,1322.83 2488.19,1653.54
  text "12V" at 98.43,1653.54 h60 r270
  text "GND" at 236.22,1653.54 h60 r270
  text "GND" at 492.13,1653.54 h60 r270
  text "3.3V" at 629.92,1653.54 h60 r270
  text "12V" at 177.17,314.96 h60 r90
  text "GND" at 295.28,314.96 h60 r90
Bottom Overlay:
  the board outline again, w10
  text "3.3V" at 2634.84,1840.55 h60 r90
  text "PA6" at 2842.52,1838.58 h60 r90
  text "GND" at 3550.2,1836.61 h60 r90
  text "PA7" at 2743.11,1835.63 h60 r90
  text "PA4" at 3042.32,1835.63 h60 r90
  text "PA3" at 3146.65,1835.63 h60 r90
  text "PA5" at 2943.9,1834.65 h60 r90
  text "PA1" at 3342.52,1834.65 h60 r90
  text "PA2" at 3241.14,1832.68 h60 r90
  text "PA0" at 3445.87,1832.68 h60 r90
  text "c" at 1641.73,1767.72 h60
  text "+" at 1429.13,1759.84 h60
  text "-" at 1531.5,1759.84 h60
  text "+" at 2314.96,1759.84 h60
  text "c" at 2110.24,1755.91 h60
  text "-" at 2204.72,1755.91 h60
  text "ID:" at 3325.24,1259.39 h60
  text "Jan Ove Saltvedt for Omega Verksted 2013. Version 2" at 3730.31,541.34 h60
  text "+" at 1407.48,206.69 h60 r90
  text "+" at 718.5,196.85 h60 r90
  text "+" at 2096.46,196.85 h60 r90
  text "+" at 2785.43,196.85 h60 r90
  text "+" at 3474.41,196.85 h60 r90
  text "14" at 866.14,147.64 h60
  text "13" at 1003.94,147.64 h60
  text "12" at 1151.57,147.64 h60
  text "11" at 1545.28,147.64 h60
  text "10" at 1702.76,147.64 h60
  text "9" at 1820.87,147.64 h60
  text "8" at 2224.41,147.64 h60
  text "7" at 2352.36,147.64 h60
  text "6" at 2500,147.64 h60
  text "5" at 2903.54,147.64 h60
  text "4" at 3051.18,147.64 h60
  text "3" at 3188.98,147.64 h60
  text "2" at 3602.36,147.64 h60
  text "1" at 3730.31,147.64 h60
  text "0" at 3887.8,147.64 h60
Mechanical 2:
  the board outline again, w10

## Text inside footprints (layer, text, board x,y; h text height)
C7: Top Overlay "-" at 763.78,1035.43 h60
D1: Top Overlay "-" at 2685.04,881.89 h39.37
J12: Top Overlay "2" at 2740.16,1102.36 h60; Top Overlay "1" at 2606.3,1102.36 h60